# EAGLE board lcdpcbcompact (EAGLE 5.06)
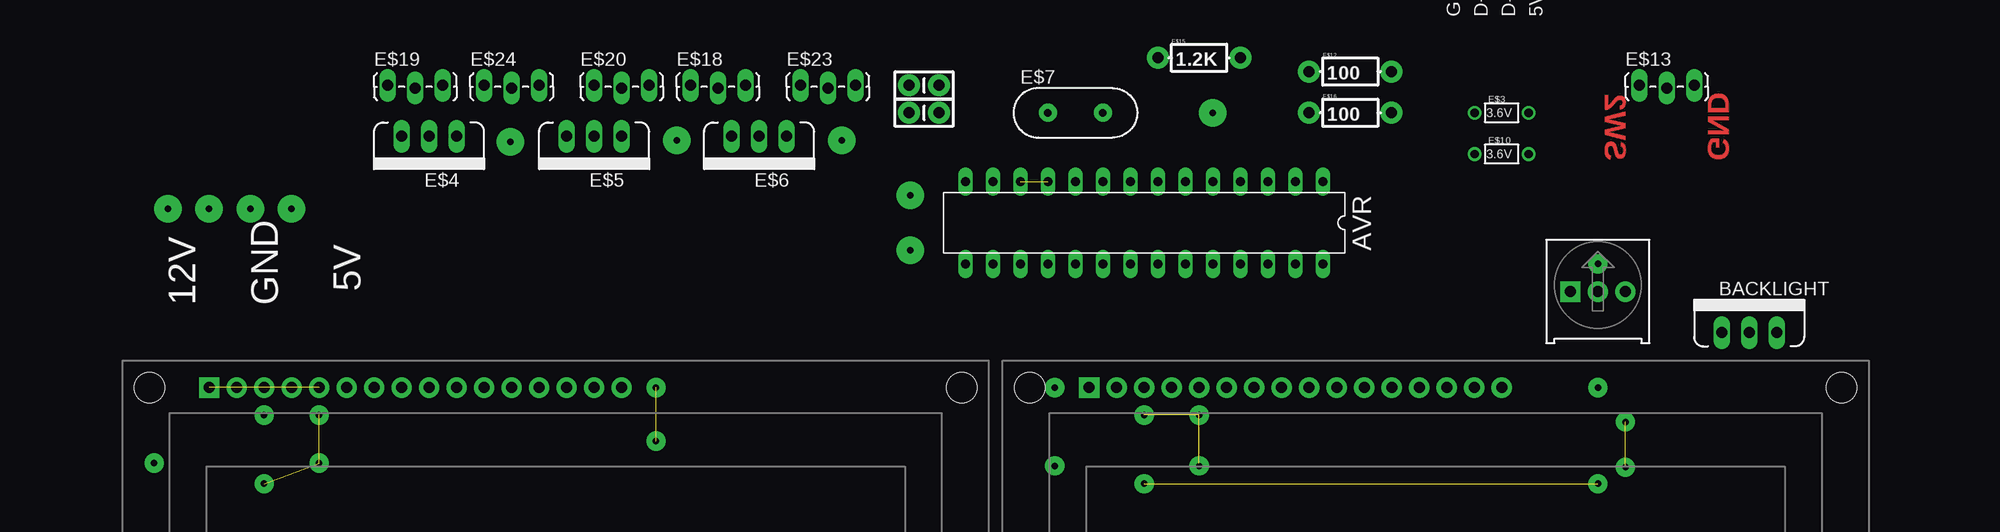
[diagram p0: board, top side]
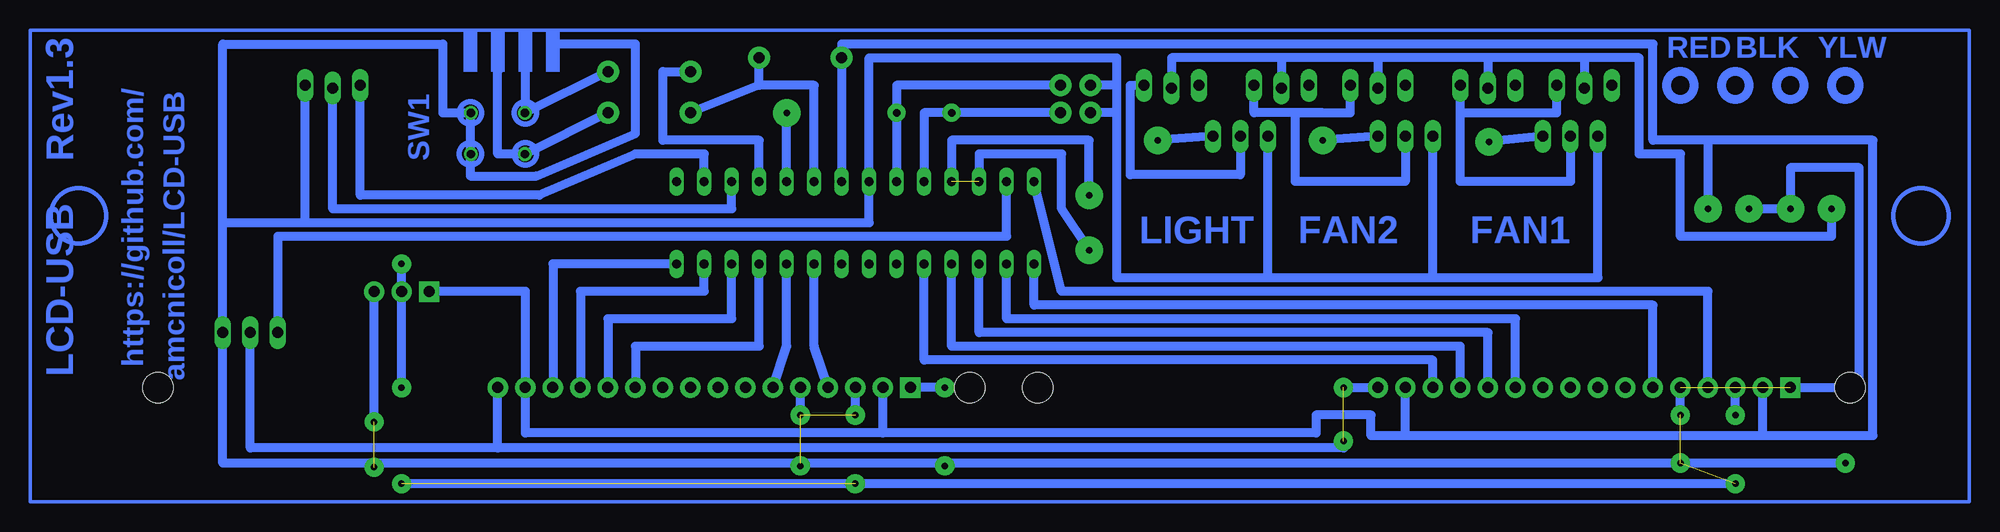
[diagram p1: board, bottom side, seen from below]

No outline drawn. Coordinates in mm, seen from the top.
Copper layers (1*16): Top 0.035mm / dielectric 1.5mm / Bottom 0.035mm
Design rules "default": minimum track width 10mil, minimum drill 24mil, track to track 8mil, track to pad 8mil, pad to pad 8mil, via to via 8mil, smd to smd 8mil, copper to edge 40mil, drill to drill 8mil, minimum pad ring 10mil, minimum via ring 8mil, stop-mask expansion 4mil, vias tented up to drill 0mil, thermal gap 10mil

## Footprints (pad centres in the part's own frame; a part is rotated, then mirrored left to right if it is on the bottom)
DIL28-3 = drill 0.813 long: 1 -16.51,-3.81; 2 -13.97,-3.81; 3 -11.43,-3.81; 4 -8.89,-3.81; 5 -6.35,-3.81; 6 -3.81,-3.81; 7 -1.27,-3.81; 8 1.27,-3.81; 9 3.81,-3.81; 10 6.35,-3.81; 11 8.89,-3.81; 12 11.43,-3.81; 13 13.97,-3.81; 14 16.51,-3.81; 15 16.51,3.81; 16 13.97,3.81; 17 11.43,3.81; 18 8.89,3.81; 19 6.35,3.81; 20 3.81,3.81; 21 1.27,3.81; 22 -1.27,3.81; 23 -3.81,3.81; 24 -6.35,3.81; 25 -8.89,3.81; 26 -11.43,3.81; 27 -13.97,3.81; 28 -16.51,3.81
TO220V = drill 1.016 long: 1 -2.54,0; 2 0,0; 3 2.54,0
LCD-16X2_NOSILK = drill 1.016 pad 1.88 square: 1 -32,15.5 | drill 1.016 pad 1.88 round: 2 -29.46,15.5; 3 -26.92,15.5; 4 -24.38,15.5; 5 -21.84,15.5; 6 -19.3,15.5; 7 -16.76,15.5; 8 -14.22,15.5; 9 -11.68,15.5; 10 -9.14,15.5; 11 -6.6,15.5; 12 -4.06,15.5; 13 -1.52,15.5; 14 1.02,15.5; 15 3.56,15.5; 16 6.1,15.5 | hole 2.8: -37.5,15.5; -37.5,-15.5; 37.5,15.5; 37.5,-15.5
1/6W-RES = drill 0.762 round: 1 -2.5,0; 2 2.5,0
HC49US = drill 0.7 pad 1.651 round: 1 -2.54,0; 2 2.54,0
CAP-PTH-SMALL-KIT = drill 1.016 pad 2.032 round: 1 -1.397,0; 2 1.397,0
3386U = drill 1.016 pad 1.88 square: 1 -2.54,-0.015 | drill 1.016 pad 1.88 round: 2 0,-0.015; 3 2.54,-0.015
AXIAL-0.3-KIT = drill 1.016 pad 2.032 round: P$1 -3.81,0; P$2 3.81,0
1X03_LOCK_LONGPADS = drill 1.016 long: 1 0,0; 2 2.54,-0.254; 3 5.08,0

## Placement (x,y rotation side)
AVR  [DIL28-3]  96.52,49.53 180 top
BACKLIGHT  [TO220V]  152.4,39.37 0 top
E$1  [LCD-16X2_NOSILK]  42.16,18.8 0 top
E$2  [LCD-16X2_NOSILK]  123.44,18.8 0 top
E$3  3.6V  [1/6W-RES]  129.54,59.69 0 top
E$4  [TO220V]  30.48,57.53 180 top
E$5  [TO220V]  45.72,57.53 180 top
E$6  [TO220V]  60.96,57.53 180 top
E$7  [HC49US]  90.17,59.69 0 top
E$8  [CAP-PTH-SMALL-KIT]  76.2,59.69 180 top
E$9  [CAP-PTH-SMALL-KIT]  76.2,62.23 180 top
E$10  3.6V  [1/6W-RES]  129.54,55.88 0 top
E$11  [3386U]  138.43,43.18 0 top
E$12  100  [AXIAL-0.3-KIT]  115.57,63.5 0 top
E$13  [1X03_LOCK_LONGPADS]  142.24,62.23 0 top
E$15  1.2K  [AXIAL-0.3-KIT]  101.6,64.77 0 top
E$16  100  [AXIAL-0.3-KIT]  115.57,59.69 0 top
E$18  [1X03_LOCK_LONGPADS]  54.61,62.23 0 top
E$19  [1X03_LOCK_LONGPADS]  26.67,62.23 0 top
E$20  [1X03_LOCK_LONGPADS]  45.72,62.23 0 top
E$23  [1X03_LOCK_LONGPADS]  64.77,62.23 0 top
E$24  [1X03_LOCK_LONGPADS]  35.56,62.23 0 top

## Library data of the parts
AVR = atmel
BACKLIGHT E$1-E$13 E$15 E$16 E$18-E$20 E$23 E$24 = SparkFun

## Nets
S$2: AVR.7
S$3: AVR.28
S$4: AVR.27
S$5: AVR.26
S$12: BACKLIGHT.2
S$13: AVR.19
S$15: AVR.18
S$16: AVR.17
S$17: AVR.16
S$18: E$2.1
S$19: AVR.15
S$20: AVR.14
S$21: AVR.11 AVR.12
S$22: AVR.13 BACKLIGHT.1
S$25: AVR.9 E$7.2
S$26: AVR.10 E$7.1
S$28: E$6.2 E$23.3
S$29: E$5.2 E$20.3
S$31: AVR.6 E$15.P$2 E$16.P$1
S$32: AVR.4 E$12.P$1
S$33: AVR.5
S$37: E$16.P$2
S$38: E$12.P$2
S$39: E$4.1
S$40: AVR.8 BACKLIGHT.3 E$4.3 E$5.3 E$6.3
S$41: E$5.1
S$42: E$6.1
S$44: AVR.3
S$45: E$4.2 E$19.3 E$24.3
S$46: E$18.3
S$49: AVR.2

## Tracks (layer width: path | path; a pad name or v marks a point on that pad's centre or on a via)
S$1
  Bottom 0.305: -6.35,23.75 -6.35,67.31 172.72,67.31 172.72,23.75 -6.35,23.75
S$2  (via drill 0.6 pad 2.54)
  Bottom 0.813: 93.98,30.1 127,30.1 127,43.18 135.89,43.18 | 93.98,30.1 93.98,34.29 | 17.78,57.15 v17.78,50.8 | 45.72,29.84 45.72,34.29 | 45.72,29.84 48.9,29.84 48.9,31.75 53.98,31.75 53.98,30.1 93.98,30.1 | 12.7,29.84 12.7,34.29 | 12.7,29.84 45.72,29.84 | 17.78,57.15 2.54,57.15 2.54,29.84 12.7,29.84 | 17.78,57.15 22.86,57.15 22.86,66.04 97.79,66.04 AVR.7
S$3
  Bottom 0.813: 124.46,34.29 124.46,45.72 AVR.28
S$4
  Bottom 0.813: 121.92,34.29 121.92,43.18 110.49,43.18 AVR.27
S$5
  Bottom 0.813: 119.38,34.29 119.38,40.64 107.95,40.64 AVR.26
S$6
  Bottom 0.813: 116.84,34.29 116.84,38.1 105.41,38.1 105.41,45.72
S$7
  Bottom 0.813: 104.14,34.29 102.87,38.1 102.87,45.72
S$8
  Bottom 0.813: 100.33,45.72 100.33,38.1 99.06,34.29
S$10  (via drill 0.6 pad 1.78)
  other vias: 88.27,27.05 101.6,27.05
S$11  (via drill 0.6 pad 1.78)
  Bottom 0.813: v88.27,34.29 91.44,34.29
S$12
  Bottom 0.813: BACKLIGHT.2 152.4,28.7 129.54,28.7 | 51.44,28.7 129.54,28.7 | 129.54,28.7 129.54,34.29
S$13
  Bottom 0.813: 43.18,34.29 43.18,36.83 90.17,36.83 AVR.19
S$14  (via drill 0.6 pad 1.78)  (1 unrouted)
  other vias: 138.43,25.4 96.52,25.4
S$15
  Bottom 0.813: 40.64,34.29 40.64,38.1 87.63,38.1 AVR.18
S$16
  Bottom 0.813: 38.1,34.29 38.1,39.37 85.09,39.37 AVR.17
S$17
  Bottom 0.813: 35.56,34.29 35.56,40.64 82.55,40.64 AVR.16
S$19
  Bottom 0.813: 22.86,34.29 22.86,41.91 80.01,41.91 AVR.15
S$20
  Bottom 0.813: 17.78,34.29 17.78,43.18 77.47,43.18 AVR.14
S$21  (via drill 0.6 pad 2.54)  (1 unrouted)
  Bottom 0.813: v74.93,52.07 74.93,57.15 87.63,57.15 AVR.11 | AVR.12 85.09,55.88 77.47,55.88 77.47,50.8 v74.93,46.99
S$22
  Bottom 0.813: BACKLIGHT.1 149.86,48.26 82.55,48.26 AVR.13
S$23
  Bottom 0.813: 140.97,31.11 140.97,43.18
S$24
  Bottom 0.813: 138.43,34.29 138.43,45.72
S$25
  Bottom 0.813: AVR.9 E$7.2 92.71,62.23 77.47,62.23
S$26
  Bottom 0.813: AVR.10 90.17,59.69 E$7.1 77.47,59.69
S$27  (via drill 0.6 pad 2.54)
  Bottom 0.813: 29.21,64.77 24.13,64.77 24.13,55.88 20.32,55.88 20.32,48.26 6.35,48.26 v6.35,50.8 | 29.21,64.77 38.1,64.77 | 38.1,64.77 48.26,64.77 | 48.26,64.77 57.15,64.77 | 57.15,64.77 67.31,64.77 67.31,60.96 | 29.21,64.77 29.21,62.23 | 38.1,64.77 38.1,62.23 | 48.26,64.77 48.26,62.23 | 57.15,64.77 57.15,62.23
S$28
  Bottom 0.813: E$6.2 60.96,53.98 71.12,53.98 71.12,62.23 E$23.3
S$29
  Bottom 0.813: E$5.2 45.72,53.34 55.88,53.34 55.88,59.69 50.8,59.69 E$20.3
S$30  (via drill 0.6 pad 1.78)
  Bottom 0.813: v15.24,31.75 15.24,34.29
S$31
  Bottom 0.813: AVR.6 100.33,62.23 105.41,62.23 | 105.41,62.23 E$16.P$1 | 105.41,62.23 E$15.P$2
S$32
  Bottom 0.813: AVR.4 105.41,57.15 114.3,57.15 114.3,63.5 E$12.P$1
S$33
  Bottom 0.813: AVR.5 102.87,59.69
S$34  (via drill 0.6 pad 2.54)
  other vias: 102.87,59.69
S$35  (via drill 0.6 pad 1.78)
  other vias: 138.43,34.29 138.43,45.72
S$36  (via drill 0.6 pad 1.78)  (1 unrouted)
  other vias: 140.97,31.11 140.97,26.92
S$37
  Bottom 0.813: E$16.P$2 127,55.88 129.54,55.88 129.54,63.5
S$38
  Bottom 0.813: E$12.P$2 127,59.69 127,63.5
S$39  (via drill 0.6 pad 2.54)
  Bottom 0.813: E$4.1 v37.97,57.02
S$40  (via drill 0.6 pad 1.78)  (2 unrouted)
  Bottom 0.813: E$4.3 27.94,44.45 43.18,44.45 | 43.18,44.45 E$5.3 | 58.42,44.45 43.18,44.45 | 58.42,44.45 E$6.3 | 58.42,44.45 72.39,44.45 72.39,59.69 | 72.39,59.69 74.93,59.69 | 124.46,66.04 116.84,66.04 116.84,57.78 125.98,53.85 132.08,53.85 132.08,59.69 134.62,59.69 134.62,66.04 154.94,66.04 154.94,49.53 | 72.39,62.23 72.39,59.69 | 72.39,62.23 74.93,62.23 | 72.39,62.23 72.39,64.77 95.25,64.77 AVR.8 95.25,49.53 147.32,49.53 | 147.32,49.53 147.32,62.23 | 154.94,49.53 147.32,49.53 | 154.94,49.53 BACKLIGHT.3 154.94,27.3 101.6,27.3 v5.08,27.3 | v96.52,31.75 96.52,34.29 | v101.6,31.75 101.6,34.29
S$41  (via drill 0.6 pad 2.54)
  Bottom 0.813: E$5.1 v53.34,57.15
S$42  (via drill 0.6 pad 2.54)
  Bottom 0.813: E$6.1 v68.58,57.15
S$43
  Bottom 0.813: 15.24,25.4 102.87,25.4
S$44
  Bottom 0.813: 144.78,62.23 144.78,50.8 107.95,50.8 AVR.3
S$45
  Bottom 0.813: E$19.3 31.75,59.69 40.64,59.69 | E$4.2 30.48,53.34 40.64,53.34 40.64,59.69 | 40.64,59.69 E$24.3
S$46
  Bottom 0.813: E$18.3 59.69,59.69 53.34,59.69
S$47  (via drill 0.6 pad 1.78)  (1 unrouted)
  Bottom 0.813: v51.44,34.29 48.26,34.29
  other vias: 51.44,29.34
S$48  (via drill 0.6 pad 1.78, 0.6 pad 2.54)  (3 unrouted)
  Bottom 0.813: v13.97,50.8 v10.16,50.8 10.16,54.61 3.81,54.61 3.81,34.29 v5.08,34.29 10.16,34.29 | v20.32,31.75 20.32,34.29
  other vias: 20.32,27.3 15.24,25.4
S$49
  Bottom 0.813: AVR.2 110.49,55.88 116.84,55.88 125.73,52.07 142.24,52.07 142.24,62.23
S$50
  Bottom 0.813: 102.87,25.4 137.79,25.4
(copper drawn outside any net)
  shapes: Bottom area x4, Bottom circle x10

## Text on the board
Top: SW2 | GND
Bottom: LCD-USB Rev1.3 | YLW | BLK | RED | amcnicoll/LCD-USB | https://github.com/ | SW1 | FAN1 | FAN2 | LIGHT
tNames: * Hole Distance 6.7" | GND | D+ | D- | 5V | 5V | 12V | GND